# Altium PCB finalIOTboard.PcbDoc
Units mm, origin at the board's own origin, x right, y up, seen from the top; angles counter-clockwise.
Board outline 60 x 60 mm, 4 copper layers (Top Layer, Internal Plane 1, Internal Plane 2, Bottom Layer), stack 0.462 mm thick; 14 components, 13 nets, 164 pads, 3 vias.
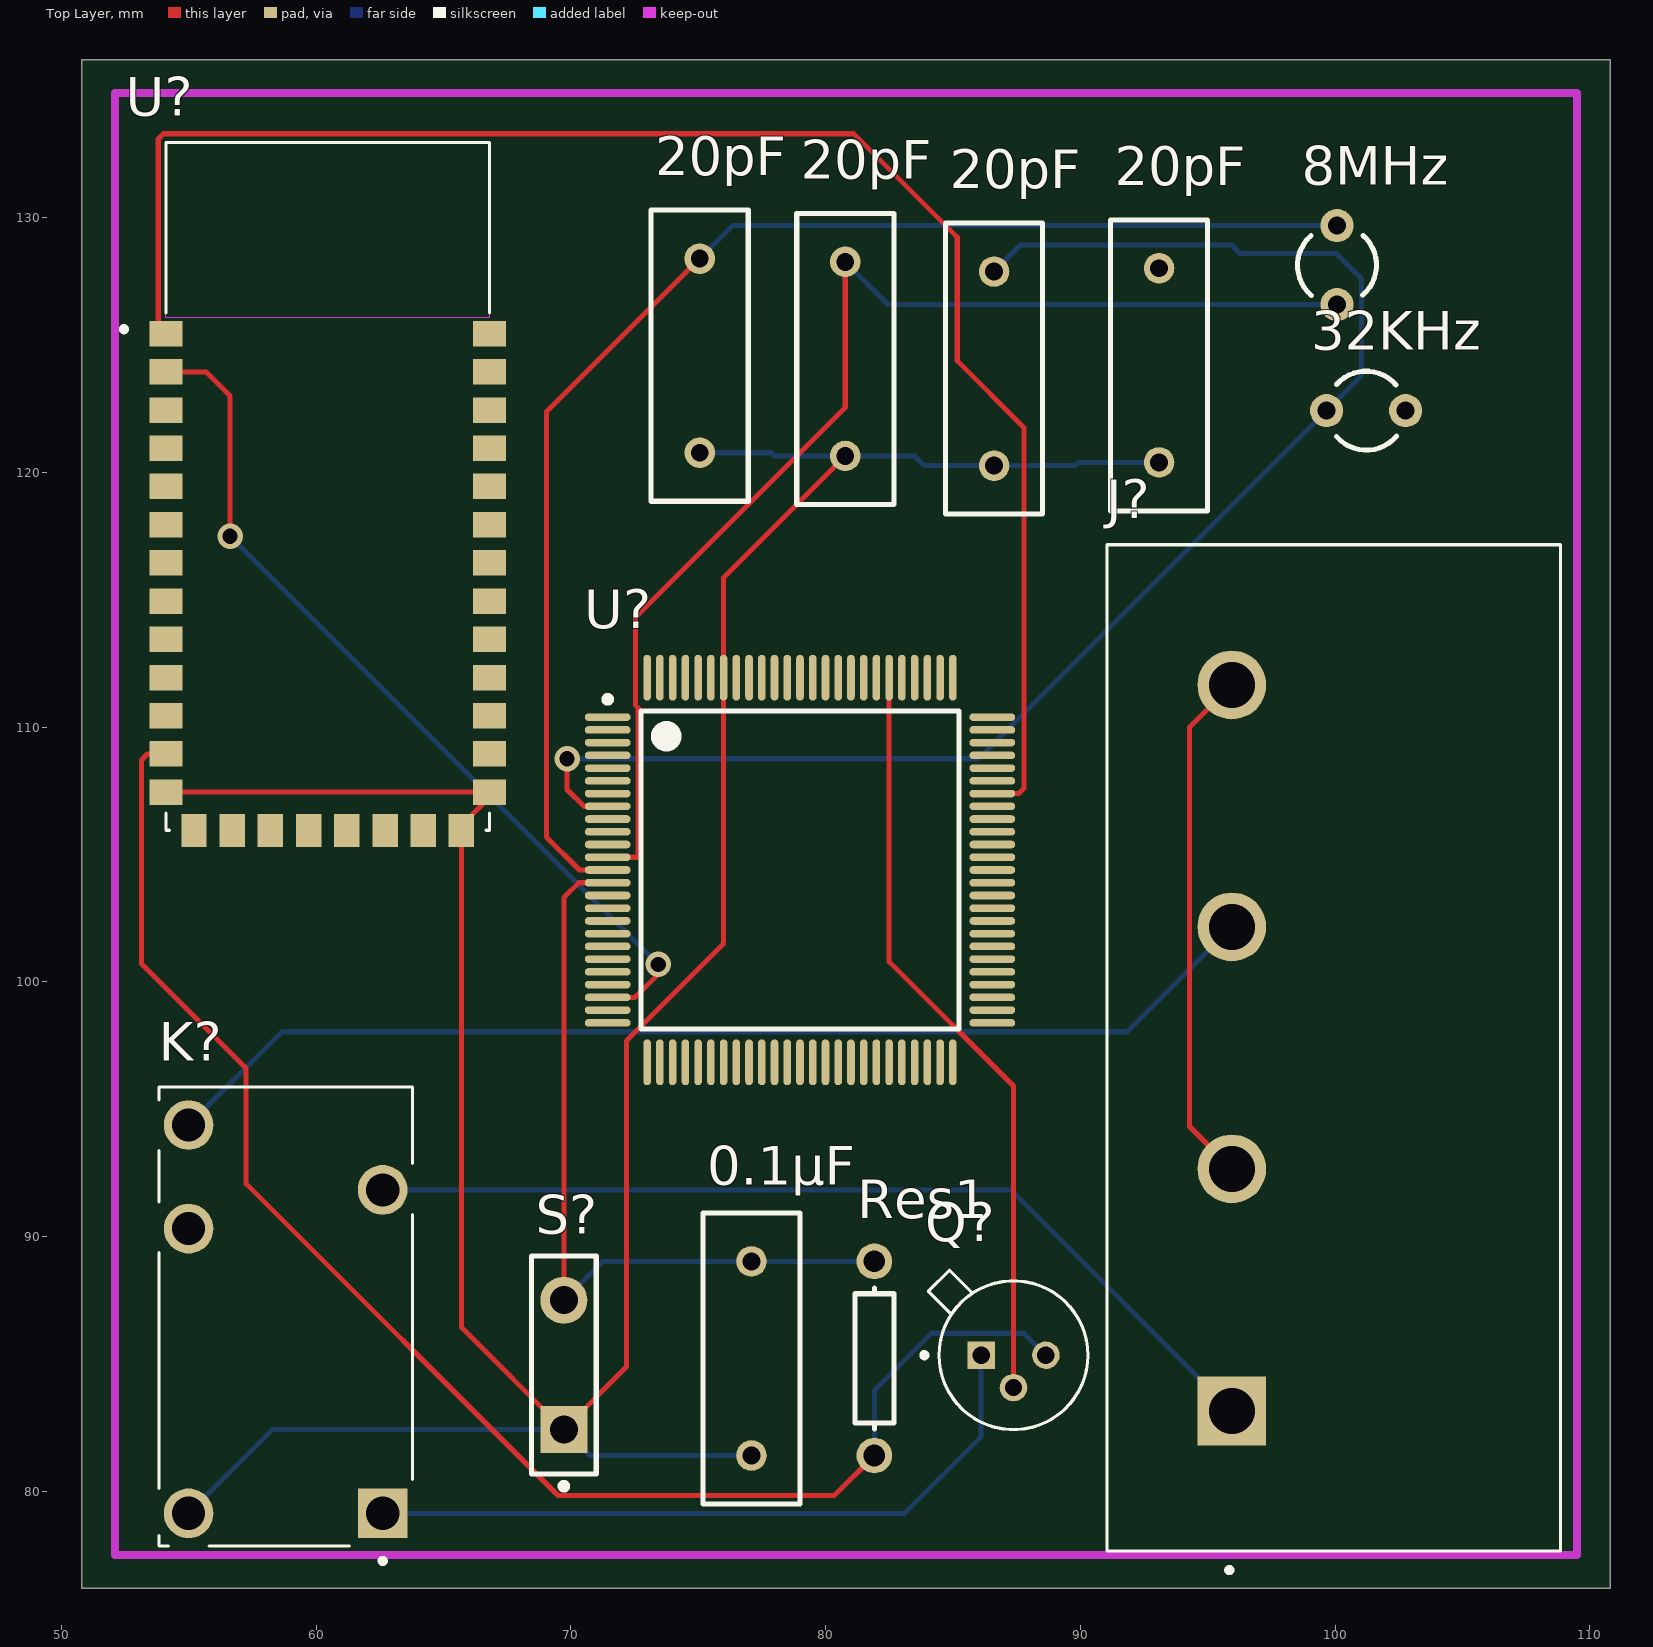
[diagram p0: Top Layer view]
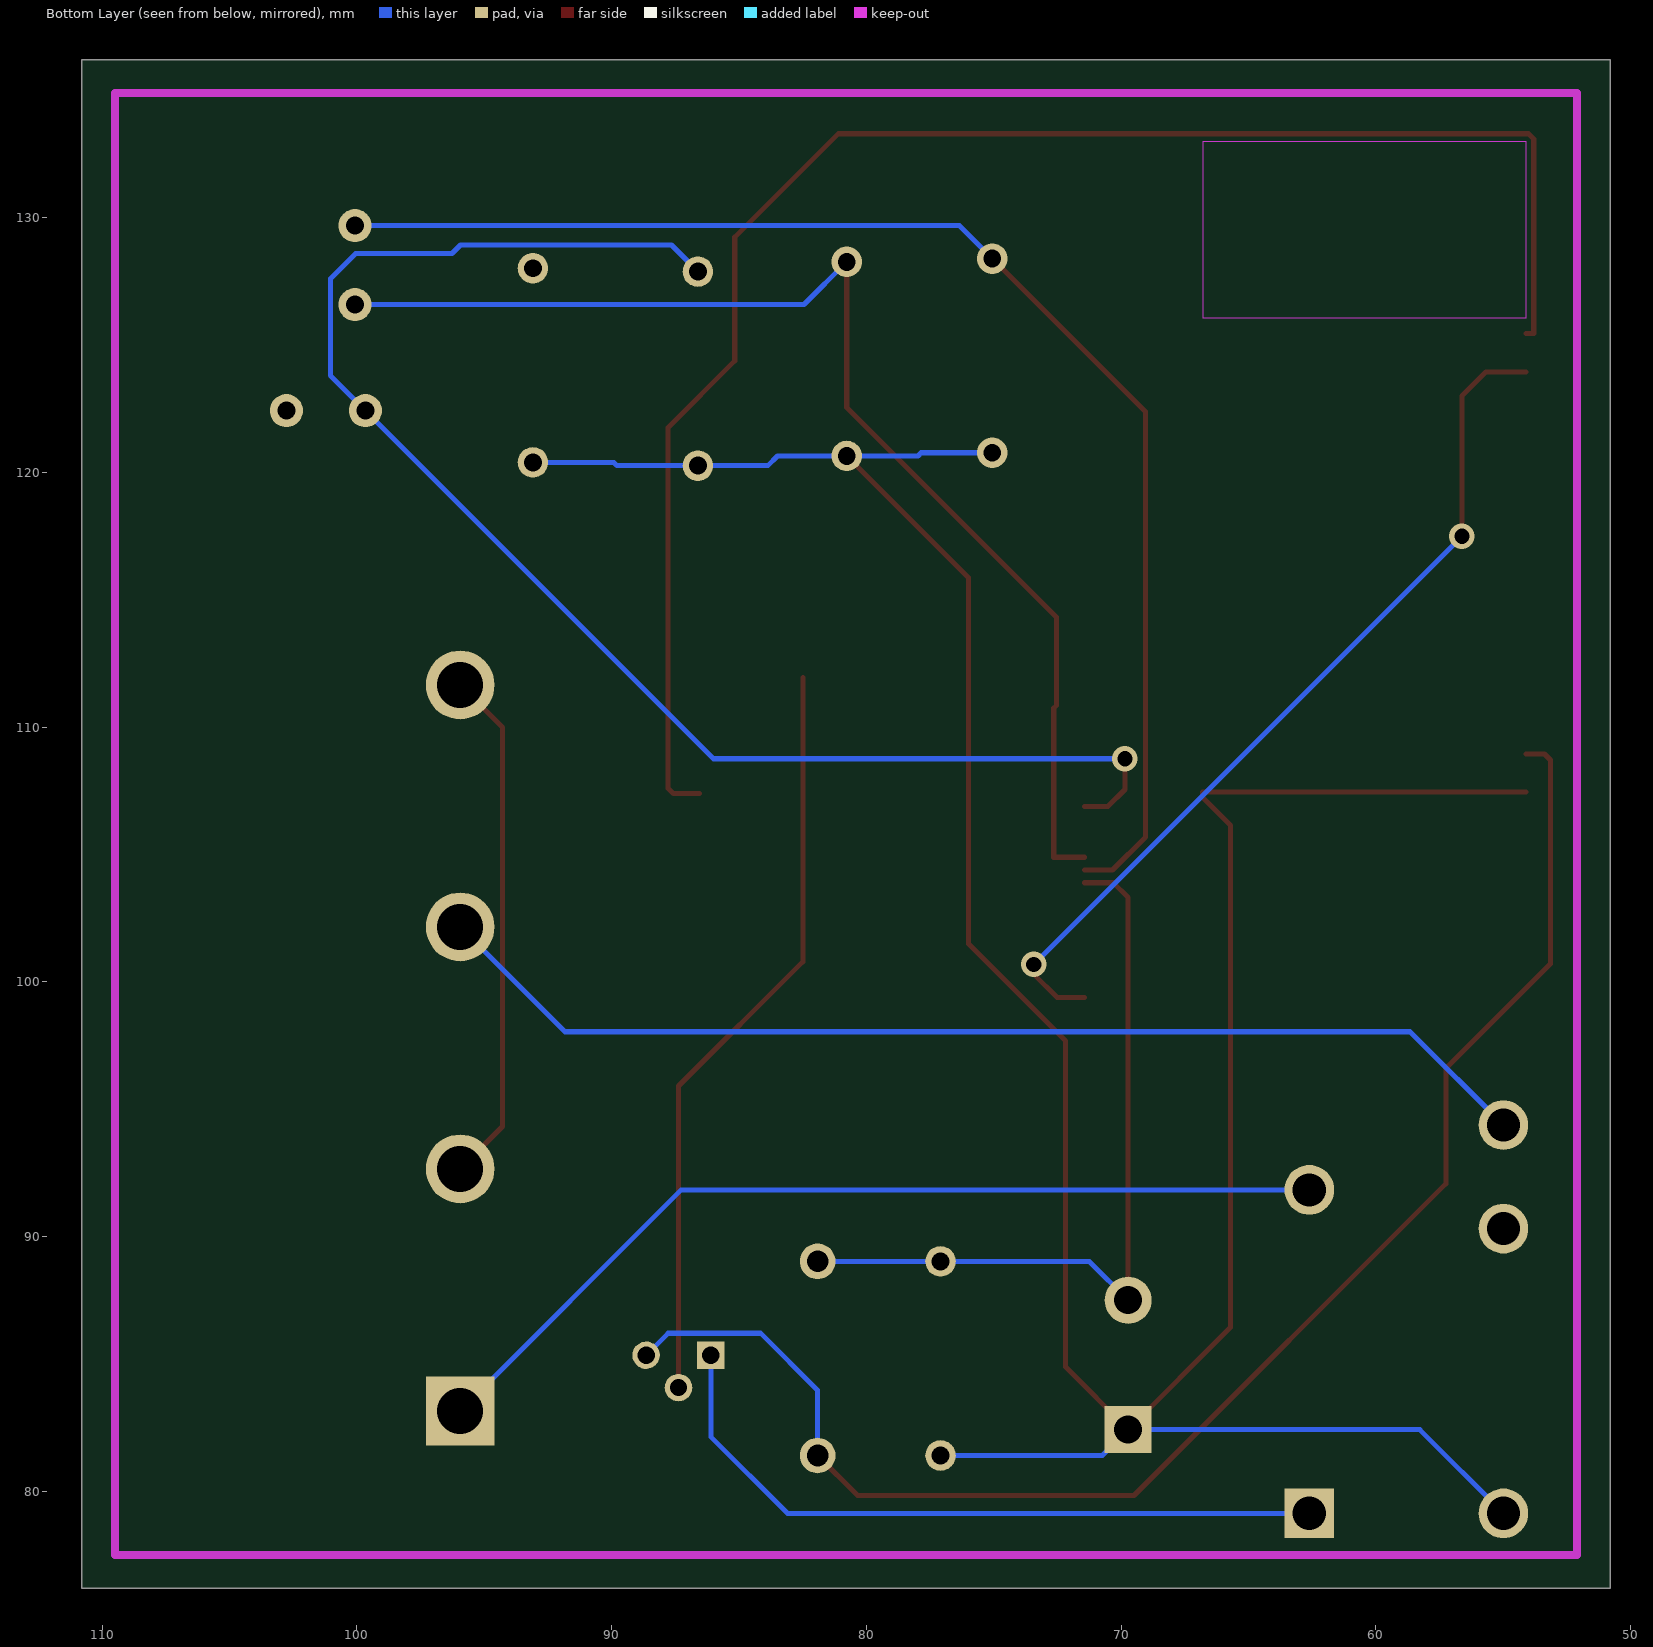
[diagram p1: Bottom Layer view, seen from below]
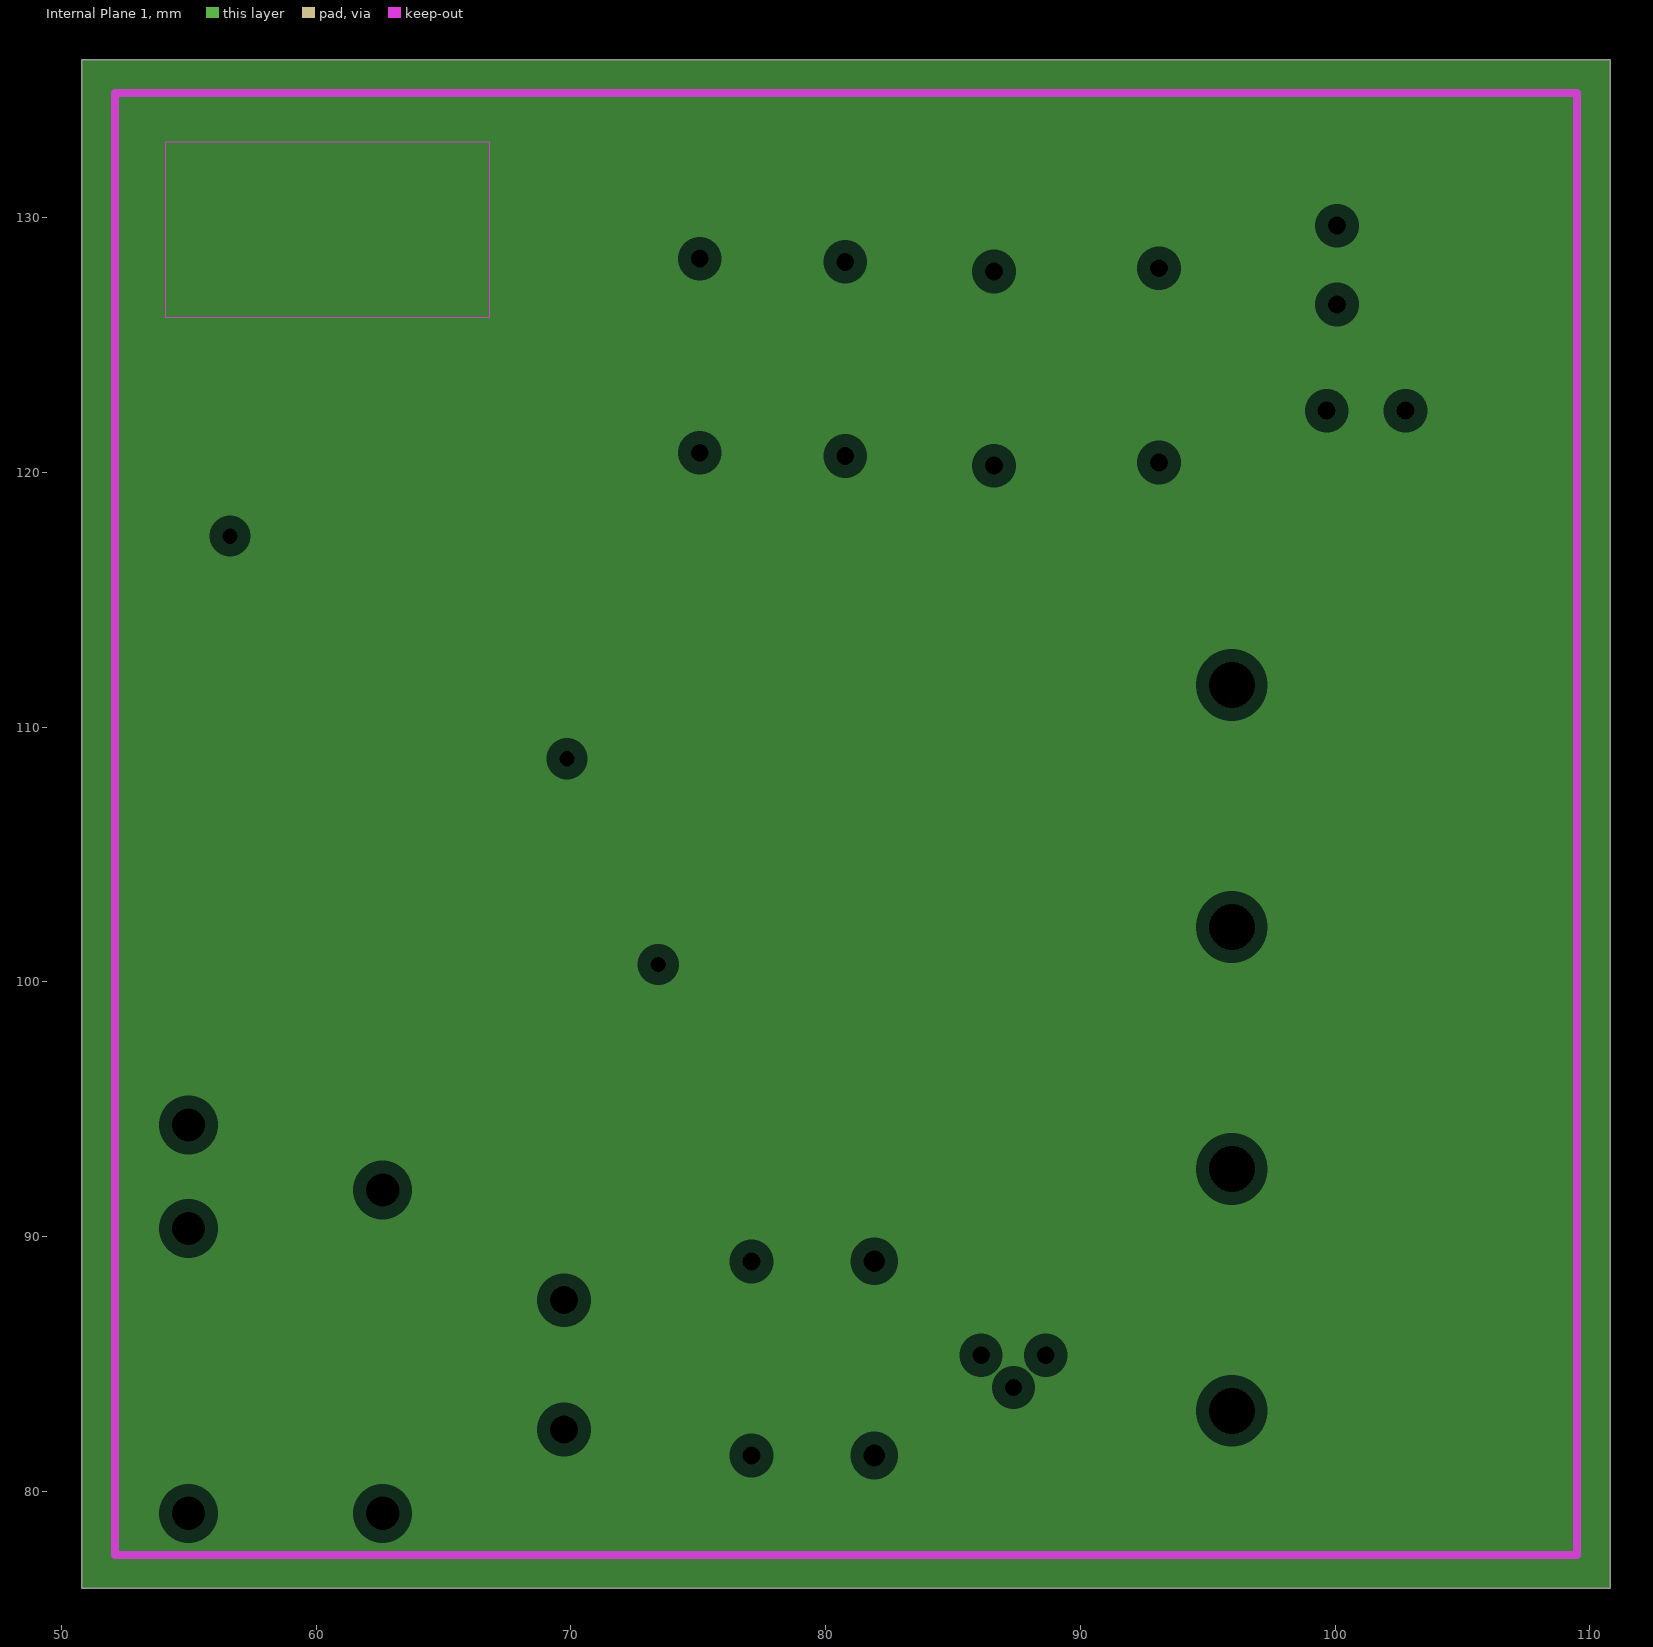
[diagram p2: Internal Plane 1, clearances drawn from the general rule]
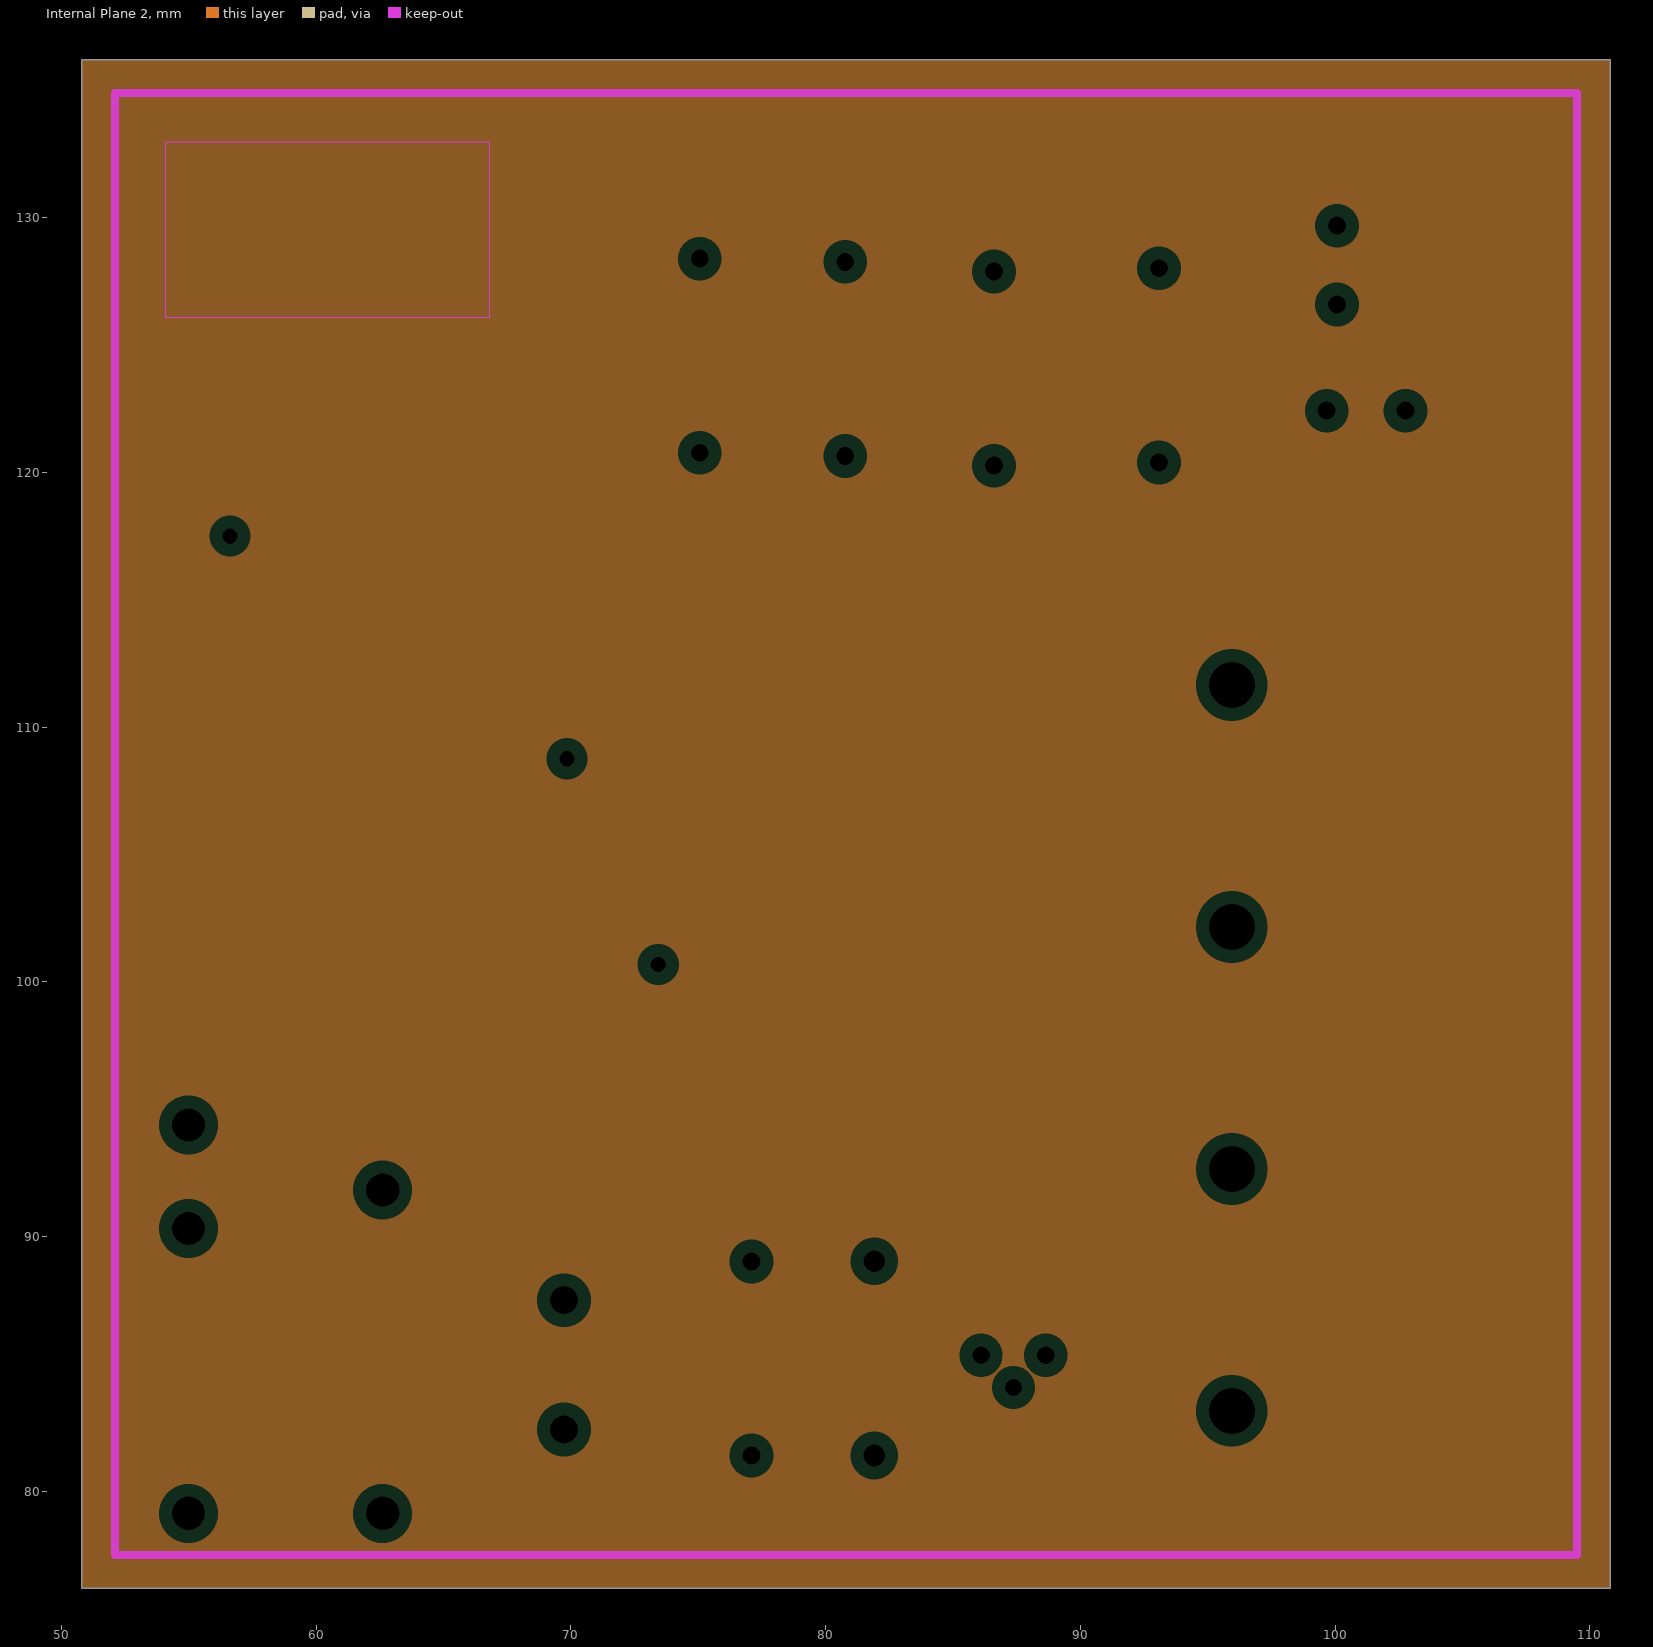
[diagram p3: Internal Plane 2, clearances drawn from the general rule]

## Layer stack, top to bottom
Top Solder: solder mask 0.0102, Solder Resist, Dk 3.5
Top Layer: signal copper 0.0356
Internal Plane 1: plane copper 0.0356
Internal Plane 2: plane copper 0.0356
Dielectric 1: dielectric 0.32, FR-4, Dk 4.8
Bottom Layer: signal copper 0.0356
Bottom Solder: solder mask 0.0102, Solder Resist, Dk 3.5

## Board outline
50.8,76.2 110.8,76.2 110.8,136.2 50.8,136.2

## Design rules (kind name [scope] priority, off if disabled: settings)
Clearance [All] p1: gap=0.2
PlaneClearance [All] p1: clearance=0.508
PlaneConnect [All] p1: planeconnectstyle=Relief reliefexpansion=0.508 reliefentries=4 reliefconductorwidth=0.254 reliefairgap=0.254
PolygonConnect [All] p1: connectstyle=Relief reliefconductorwidth=0.254 reliefentries=4 polygonreliefangle="90 Angle" airgapwidth=0.254
RoutingVias [All] p1: holewidth=0.6 width=1 viastyle="Through Hole" minholewidth=0.711 minwidth=1.27 maxholewidth=0.711 maxwidth=1.27
SolderMaskExpansion [All] p1: expansion=0.102
Width [All] p1: maxlimit=0.2 minlimit=0.2 preferedwidth=0.2
28 further rules are at their usual default settings.

## Classes and differential pairs
component class Sheet1: 0.1µF 8MHz 20pF 32KHz J? K? Q? Res1 S? U?

## Components (designator, comment, footprint, x,y, rotation, side; value= is the part's Value field where it differs from the comment)
0.1µF "C1" RAD-0.3 77.089,85.217 r90 top
8MHz "XTAL" R38 100.076,128.143 r0 top
20pF "CL1" RAD-0.3 86.614,124.079 r90 top
20pF "CL2" RAD-0.3 93.091,124.206 r90 top
20pF "Cap" RAD-0.3 75.057,124.587 r90 top
20pF "Cap" RAD-0.3 80.772,124.46 r90 top
32KHz "OSCL" R38 101.219,122.428 r90 top
J? "OSTYK44104030" OST_OSTYK44104030 99.949,97.409 r90 top
K? "J0971CS5VDC.45" RELAY_J0971CS5VDC.45 58.801,86.868 r90 top
Q? "2N2222" TO127P584H533-3 87.376,85.344 r0 top
Res1 "" AXIAL-0.3 81.915,85.217 r90 top
S? "SW-PB" SPST-2 69.723,84.963 r90 top
U? "HC-05" XCVR_HC-05 60.452,119.126 r0 top
U? "STM32F407VGT6" STM-LQFP100_N 78.994,104.394 r0 top

## Footprints (in the part's own frame and the unit in brackets; to place one, negate y for a bottom-side part, rotate by r counter-clockwise, add the part's x,y. Pads: shape width x height; smd on the part's side, far side on the other; paste and mask are expansions set on the pad)
AXIAL-0.3 [mm] "Axial Device, Thru-Hole; 2 Leads; 0.3 in Pin Spacing"
  round 1.4 hole 0.85: 1(-3.81,0) 2(3.81,0)
  silkscreen extent -2.77,-0.76 2.77,0.76
OST_OSTYK44104030 [mm]
  rect 2.7x2.7 hole 1.8: 1(-14.25,4)
  round 2.7 hole 1.8: 2(-4.75,4) 3(4.75,4) 4(14.25,4)
  silkscreen extent -20.6,-8.9 19.75,8.9, body extent -19.75,-12.9 19.75,4.9, height 14.2
R38 [mm] "Crystal, Thru-Hole; 2 Leads; Body 3.1 x 8.2 mm (Dia.xH)"
  round 1.3 hole 0.7: 1(0,1.55) 2(0,-1.55)
  silkscreen extent -1.55,-1.19 1.55,1.17
RAD-0.3 [mm] "Radial Cap, Thru-Hole; 2 Leads; 0.3 in Pin Spacing"
  round 1.2 hole 0.7: 1(-3.81,0) 2(3.81,0)
  silkscreen extent -5.71,-1.91 5.71,1.91
RELAY_J0971CS5VDC.45 [mm]
  round 1.95 hole 1.3: 11(4.97,-3.81) 12(3.446,3.81) 14(7.51,3.81) A2(-7.73,3.81)
  rect 1.95x1.95 / inner round 1.95 / far side rect 1.95x1.95 hole 1.3: A1(-7.73,-3.81)
  silkscreen extent -9.7,-4.97 9.01,4.97, body extent -9.01,-4.97 9.01,4.97, height 15.3
SPST-2 [mm] "Switch; 2 Leads"
  rect 1.85x1.85 hole 1.1: 1(-2.54,0)
  round 1.85 hole 1.1: 2(2.54,0)
  silkscreen extent -4.89,-1.27 4.28,1.27
STM-LQFP100_N [mm] "Thin QFP, 100-Leads, Body 14x14mm, Pitch 0.5mm, IPC Medium Density"
  oval 1.8x0.3 smd: 1(-7.55,6) 2(-7.55,5.5) 3(-7.55,5) 4(-7.55,4.5) 5(-7.55,4) 6(-7.55,3.5) 7(-7.55,3) 8(-7.55,2.5) 9(-7.55,2) 10(-7.55,1.5) 11(-7.55,1) 12(-7.55,0.5) 13(-7.55,0) 14(-7.55,-0.5) 15(-7.55,-1) 16(-7.55,-1.5) 17(-7.55,-2) 18(-7.55,-2.5) 19(-7.55,-3) 20(-7.55,-3.5) 21(-7.55,-4) 22(-7.55,-4.5) 23(-7.55,-5) 24(-7.55,-5.5) 25(-7.55,-6) 51(7.55,-6) 52(7.55,-5.5) 53(7.55,-5) 54(7.55,-4.5) 55(7.55,-4) 56(7.55,-3.5) 57(7.55,-3) 58(7.55,-2.5) 59(7.55,-2) 60(7.55,-1.5) 61(7.55,-1) 62(7.55,-0.5) 63(7.55,0) 64(7.55,0.5) 65(7.55,1) 66(7.55,1.5) 67(7.55,2) 68(7.55,2.5) 69(7.55,3) 70(7.55,3.5) 71(7.55,4) 72(7.55,4.5) 73(7.55,5) 74(7.55,5.5) 75(7.55,6)
  oval 0.3x1.8 smd: 26(-6,-7.55) 27(-5.5,-7.55) 28(-5,-7.55) 29(-4.5,-7.55) 30(-4,-7.55) 31(-3.5,-7.55) 32(-3,-7.55) 33(-2.5,-7.55) 34(-2,-7.55) 35(-1.5,-7.55) 36(-1,-7.55) 37(-0.5,-7.55) 38(0,-7.55) 39(0.5,-7.55) 40(1,-7.55) 41(1.5,-7.55) 42(2,-7.55) 43(2.5,-7.55) 44(3,-7.55) 45(3.5,-7.55) 46(4,-7.55) 47(4.5,-7.55) 48(5,-7.55) 49(5.5,-7.55) 50(6,-7.55) 76(6,7.55) 77(5.5,7.55) 78(5,7.55) 79(4.5,7.55) 80(4,7.55) 81(3.5,7.55) 82(3,7.55) 83(2.5,7.55) 84(2,7.55) 85(1.5,7.55) 86(1,7.55) 87(0.5,7.55) 88(0,7.55) 89(-0.5,7.55) 90(-1,7.55) 91(-1.5,7.55) 92(-2,7.55) 93(-2.5,7.55) 94(-3,7.55) 95(-3.5,7.55) 96(-4,7.55) 97(-4.5,7.55) 98(-5,7.55) 99(-5.5,7.55) 100(-6,7.55)
  silkscreen extent -7.67,-6.25 6.25,6.82, body extent -7,-7 7,7, height 1.6
TO127P584H533-3 [mm]
  rect 1.08x1.08 / inner round 1.08 / far side rect 1.08x1.08 hole 0.68: 1(-1.27,0)
  round 1.08 hole 0.68: 2(0,-1.27) 3(1.27,0)
  silkscreen extent -3.6,-2.92 2.92,3.34, body extent -3.27,-2.9 2.9,3.27, height 18
XCVR_HC-05 [mm]
  rect 1.3x1 smd: 1(-6.35,6.325) 2(-6.35,4.825) 3(-6.35,3.325) 4(-6.35,1.825) 5(-6.35,0.325) 6(-6.35,-1.175) 7(-6.35,-2.675) 8(-6.35,-4.175) 9(-6.35,-5.675) 10(-6.35,-7.175) 11(-6.35,-8.675) 12(-6.35,-10.175) 13(-6.35,-11.675) 22(6.35,-11.675) 23(6.35,-10.175) 24(6.35,-8.675) 25(6.35,-7.175) 26(6.35,-5.675) 27(6.35,-4.175) 28(6.35,-2.675) 29(6.35,-1.175) 30(6.35,0.325) 31(6.35,1.825) 32(6.35,3.325) 33(6.35,4.825) 34(6.35,6.325)
  rect 1x1.3 smd: 14(-5.25,-13.175) 15(-3.75,-13.175) 16(-2.25,-13.175) 17(-0.75,-13.175) 18(0.75,-13.175) 19(2.25,-13.175) 20(3.75,-13.175) 21(5.25,-13.175)
  Keep-Out Layer region: 6.35,6.95 -6.35,6.95 -6.35,13.85 6.35,13.85
  Keep-Out Layer region: 6.35,6.95 -6.35,6.95 -6.35,13.85 6.35,13.85
  silkscreen extent -8.1,-13.17 6.35,13.83

## Part data
0.1µF 20pF 20pF: library part Cap, "Capacitor"
8MHz: "Crystal Oscillator"
20pF 20pF: "Capacitor"
32KHz: library part XTAL, "Crystal Oscillator"
J?: "4 Circuit 0.374 (9.50mm) Barrier Block Connector, Screws with Captive Plate"
K?: "General Purpose Relay SPDT (1 Form C) 5VDC Coil Through Hole"
Q?: "Bipolar (BJT) Transistor NPN 50V 800mA 300mW Surface Mount Ceramic SMD"
Res1: library part Res1, "Resistor"
S?: "Switch"
U?: "Bluetooth to Serial Port Module"
U?: "ARM Cortex-M4 32-bit MCU+FPU, 210 DMIPS, 1024 kB Flash, 192 kB Internal RAM, 82 I/Os, 100-pin LQFP, -40 to 85 degC, Tray"

## Via types
v1: diameter 1, hole 0.6, Top Layer to Bottom Layer, 3 vias

## Nets (pads, with @x,y where several pads share a name; then routed paths per layer and width w, separated by ;. In a path a pad name is that pad's centre, name@x,y a point inside that pad or via, vN(x,y) a via of type N, cw(c..) or ccw(c..) an arc to the next point about the centre after c; other vN are vias at no path point)
GND: 0.1µF.1 20pF.1 K?.A2 S?.1 U?.13@54.102,107.451 U?.21@65.702,105.951 U?.22@66.802,107.451 U?.94 | length 124.8
  Top Layer w0.2: U?.13@54.102,107.451 66.802,107.451 66.802,107.247 65.702,106.147 65.702,105.951 65.702,86.444 S?.1 72.187,84.887 72.187,97.688 75.994,101.496 U?.94 75.994,115.872 20pF.1@80.772,120.65
  Bottom Layer w0.2: K?.A2 58.276,82.423 S?.1 70.739,81.407 0.1µF.1 ; 20pF.1@75.057,120.777 77.851,120.777 77.978,120.65 80.772,120.65 83.49,120.65 83.871,120.269 86.614,120.269 89.789,120.269 89.916,120.396 20pF.1@93.091,120.396
Net0.1µF_2: 0.1µF.2 Res1.2 S?.2 U?.14@71.444,103.894 | length 30.6
  Top Layer w0.2: S?.2 69.723,103.31 70.307,103.894 U?.14@71.444,103.894
  Bottom Layer w0.2: S?.2 71.247,89.027 0.1µF.2 Res1.2
Net8MHz_1: 8MHz.1 20pF.2@75.057,128.397 U?.13@71.444,104.394 | length 53.7
  Top Layer w0.2: U?.13@71.444,104.394 70.333,104.394 69.044,105.683 69.044,122.384 20pF.2@75.057,128.397
  Bottom Layer w0.2: 20pF.2@75.057,128.397 76.353,129.693 8MHz.1
Net8MHz_2: 8MHz.2 20pF.2@80.772,128.27 U?.12@71.444,104.894 | length 48
  Top Layer w0.2: U?.12@71.444,104.894 72.644,104.894 72.644,110.744 72.542,110.846 72.542,114.325 80.772,122.555 20pF.2@80.772,128.27
  Bottom Layer w0.2: 20pF.2@80.772,128.27 82.449,126.593 8MHz.2
Net20pF_2: 20pF.2@86.614,127.889 32KHz.1 U?.8@71.444,106.894 | length 59.7
  Top Layer w0.2: v1(69.85,108.763) 69.85,107.554 70.51,106.894 U?.8@71.444,106.894
  Bottom Layer w0.2: v1(69.85,108.763) 86.004,108.763 32KHz.1 101.041,123.8 101.041,127.61 100.051,128.6 96.266,128.6 95.936,128.93 87.655,128.93 20pF.2@86.614,127.889
NetJ?_1: J?.1 K?.11 | length 36.9
  Bottom Layer w0.2: K?.11 87.27,91.838 J?.1
NetJ?_2: J?.2 J?.4 | length 20.4
  Top Layer w0.2: J?.2 94.285,94.323 94.285,109.995 J?.4
NetJ?_3: J?.3 K?.14 | length 44.2
  Bottom Layer w0.2: K?.14 58.657,98.044 91.834,98.044 J?.3
NetK?_A1: K?.A1 Q?.1 | length 27.9
  Bottom Layer w0.2: K?.A1 83.1,79.138 86.106,82.144 Q?.1
NetQ?_2: Q?.2 U?.81 | length 29.9
  Top Layer w0.2: U?.81 82.494,100.792 87.376,95.91 Q?.2
NetU?_1: U?.1@54.102,125.451 U?.69 | length 65.1
  Top Layer w0.2: U?.1@54.102,125.451 53.797,125.451 53.797,133.096 54,133.299 81.102,133.299 85.166,129.235 85.166,124.384 87.782,121.768 87.782,107.597 87.579,107.394 U?.69
NetU?_2: U?.2@54.102,123.951 U?.23@71.444,99.394 | length 34.9
  Top Layer w0.2: U?.2@54.102,123.951 55.677,123.951 56.617,123.011 v1(56.617,117.5) ; U?.23@71.444,99.394 72.521,99.394 73.431,100.305 v1(73.431,100.686)
  Bottom Layer w0.2: v1(56.617,117.5) v1(73.431,100.686)
VCC: Q?.3 Res1.1 U?.12@54.102,108.951 | length 60.4
  Top Layer w0.2: U?.12@54.102,108.951 53.376,108.951 53.137,108.712 53.137,100.711 57.252,96.596 57.252,92.075 69.494,79.832 80.34,79.832 Res1.1
  Bottom Layer w0.2: Res1.1 81.915,83.972 84.15,86.208 87.782,86.208 Q?.3
pads on no net: 20pF.2@93.091,128.016 32KHz.2 K?.12 U?.1@71.444,110.394 U?.2@71.444,109.894 U?.3 U?.4 U?.5 U?.6 U?.7 U?.8@54.102,114.951 U?.9 U?.10 U?.11 U?.14@55.202,105.951 U?.15 U?.16 U?.17 U?.18 U?.19 U?.20 U?.21@71.444,100.394 U?.22@71.444,99.894 U?.23@66.802,108.951 U?.24 U?.25 U?.26 U?.27 U?.28 U?.29 U?.30 U?.31 U?.32 U?.33 U?.34 U?.35 U?.36 U?.37 U?.38 U?.39 U?.40 U?.41 U?.42 U?.43 U?.44 U?.45 U?.46 U?.47 U?.48 U?.49 U?.50 U?.51 U?.52 U?.53 U?.54 U?.55 U?.56 U?.57 U?.58 U?.59 U?.60 U?.61 U?.62 U?.63 U?.64 U?.65 U?.66 U?.67 U?.68 U?.70 U?.71 U?.72 U?.73 U?.74 U?.75 U?.76 U?.77 U?.78 U?.79 U?.80 U?.82 U?.83 U?.84 U?.85 U?.86 U?.87 U?.88 U?.89 U?.90 U?.91 U?.92 U?.93 U?.95 U?.96 U?.97 U?.98 U?.99 U?.100

## Keep-outs
Keep-Out Layer:
  lines w0.3: 52.1,77.5 52.1,134.9 109.5,134.9 109.5,77.5 52.1,77.5

## Silkscreen, mask and mechanical layers (free items; w line width, h text height)
Drill Drawing:
  text "FIXI design" at 68.707,77.5 h1.52

## Dimensions
52.1,77.5 to 52.1,134.9 on Mechanical 1
52.1,77.5 to 109.5,77.5 on Mechanical 1